# Altium PCB vt18_cpu_board.PcbDoc (part 4 of 7)
Units mil, origin at the board's own origin, x right, y up, seen from the top; angles counter-clockwise.
Board outline 2283.46 x 2244.09 mil, 8 copper layers (Top Layer, GND1, Signal Layer 1, POWER1, POWER2, Signal Layer 2, GND2, Bottom Layer), stack 66.304 mil thick; 339 components, 286 nets, 1965 pads, 1047 vias.
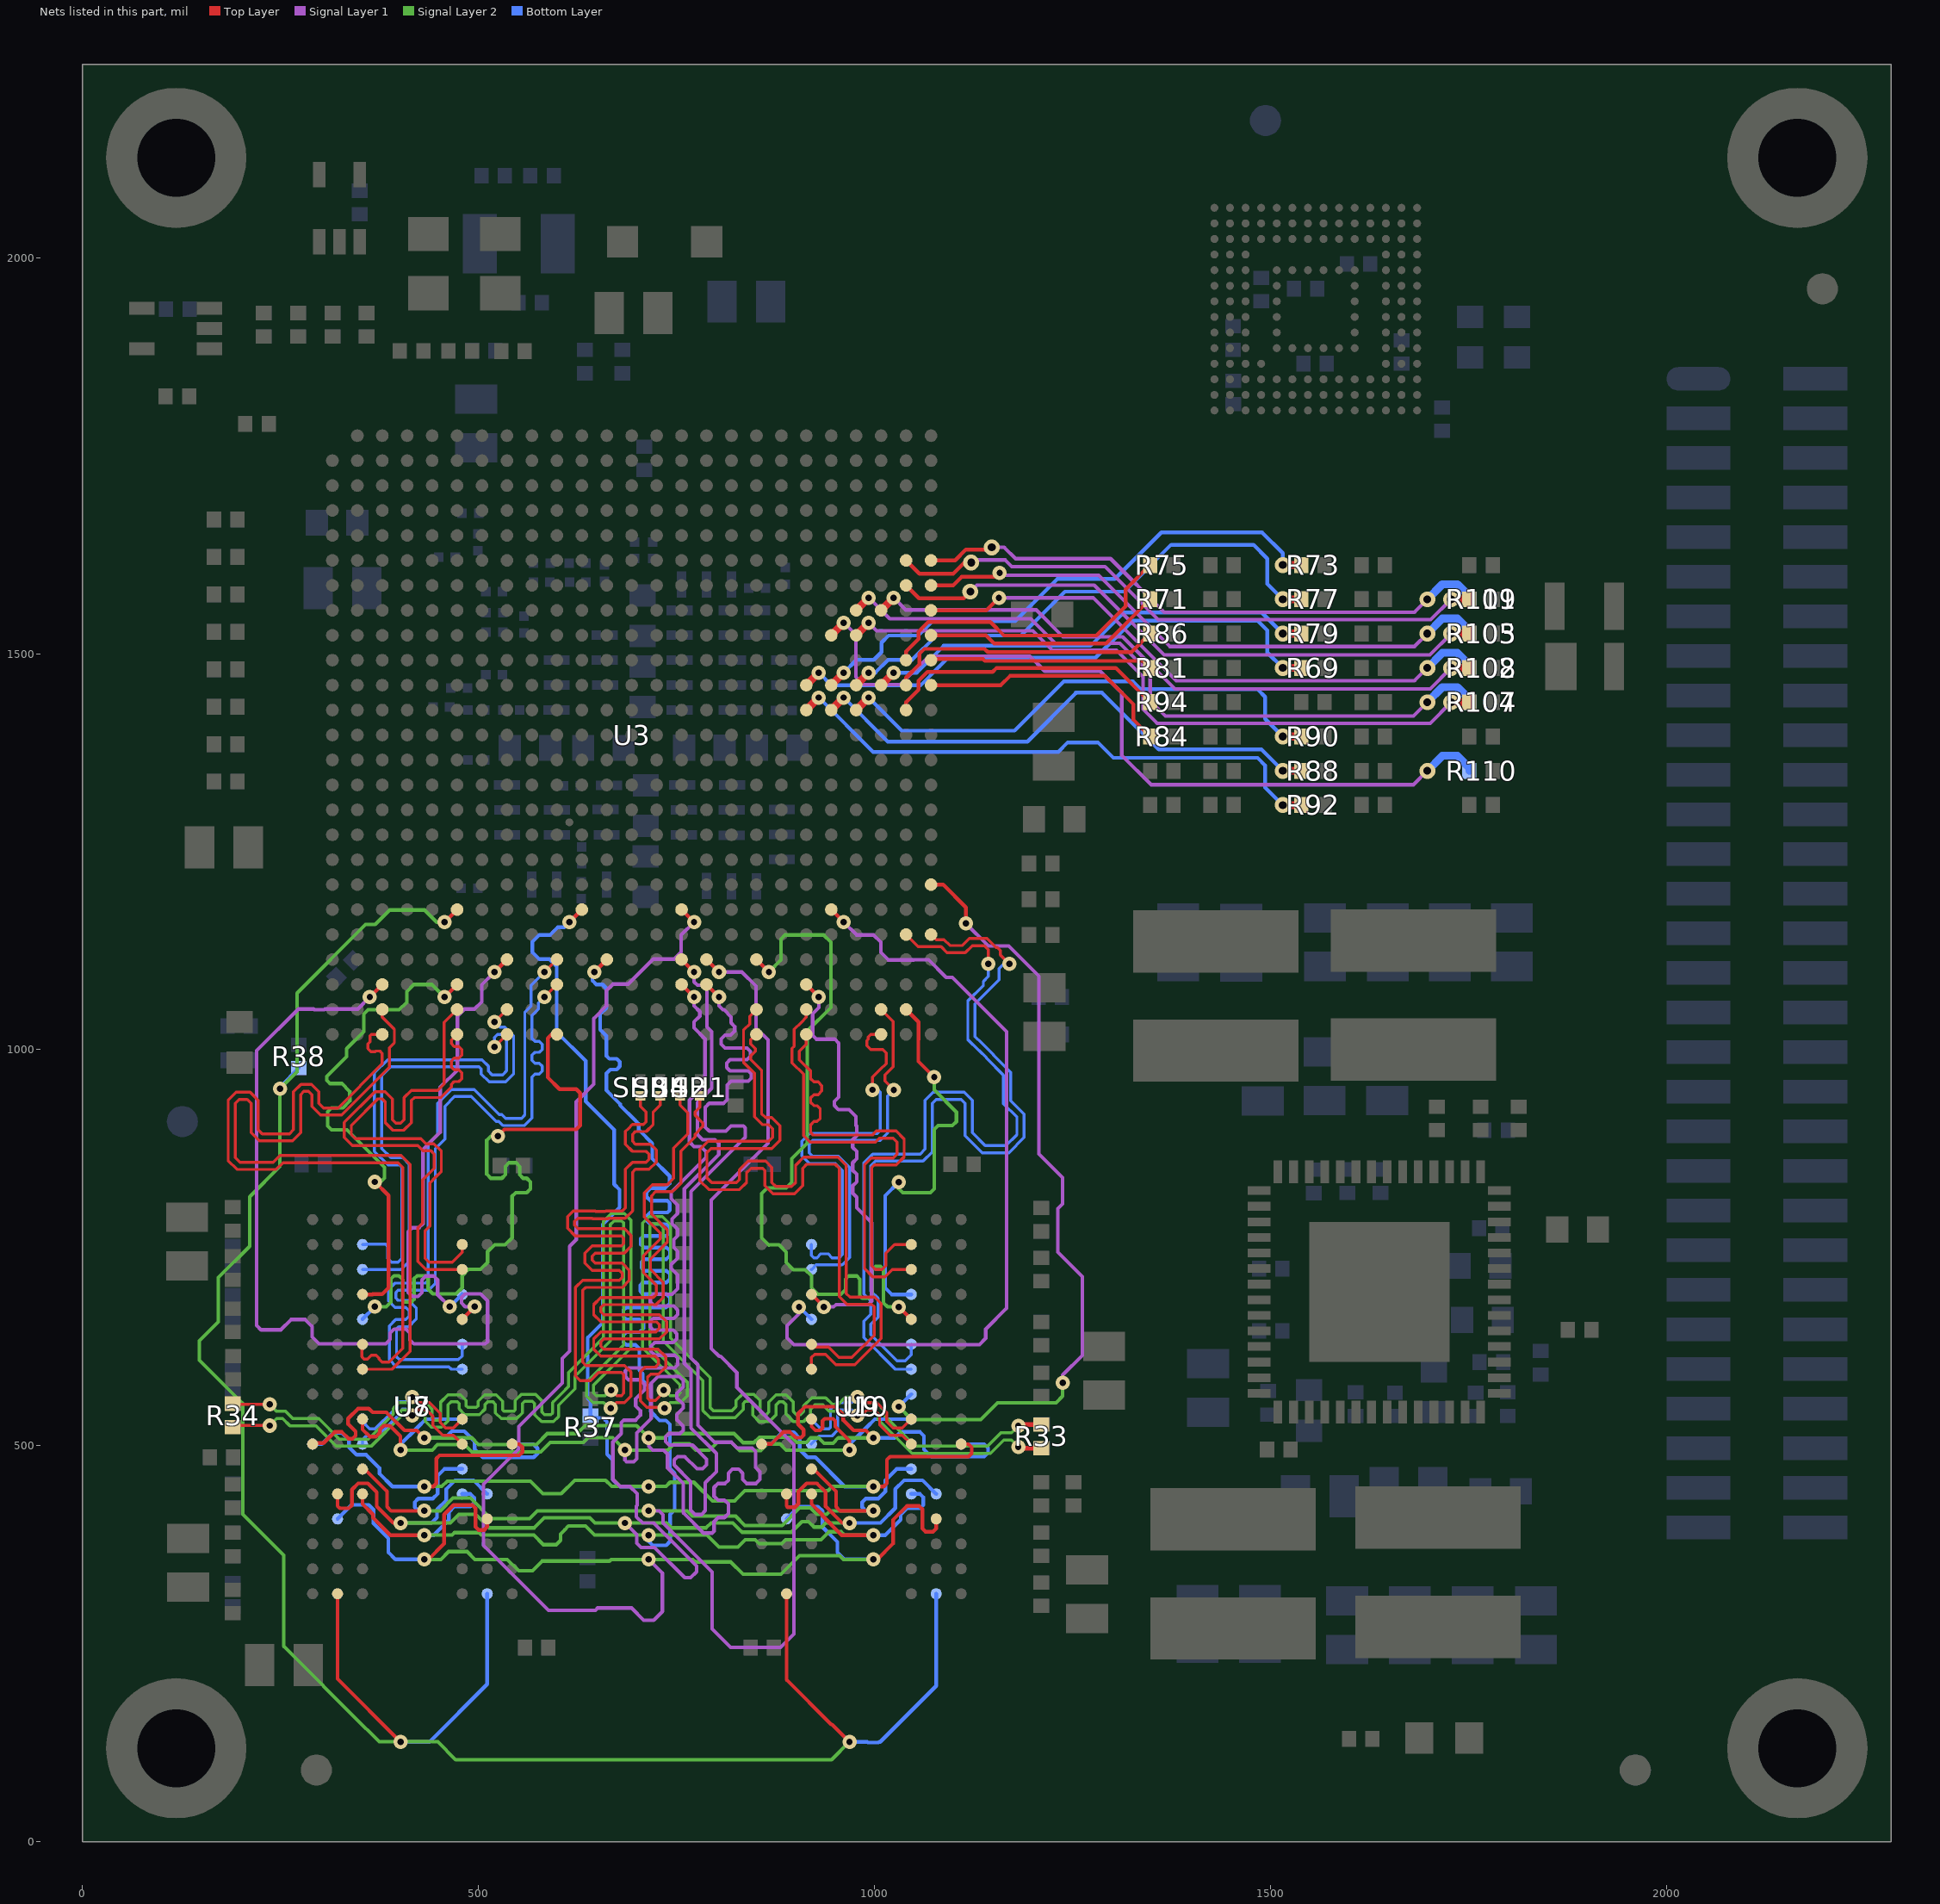
[diagram p10: the nets of this part, all layers, seen from the top]

## Via types
v1: diameter 18, hole 8, Top Layer to Bottom Layer, tented both sides, 718 vias
v2: diameter 20, hole 10, Top Layer to Bottom Layer, tented both sides, 300 vias
v3: diameter 25, hole 15, Top Layer to Bottom Layer, tented both sides, 27 vias
v4: diameter 17.99, hole 7.99, Top Layer to Bottom Layer, tented both sides, 2 vias

## Nets (pads, with @x,y where several pads share a name; then routed paths per layer and width w, separated by ;. In a path a pad name is that pad's centre, name@x,y a point inside that pad or via, vN(x,y) a via of type N, cw(c..) or ccw(c..) an arc to the next point about the centre after c; other vN are vias at no path point) (continued)
DRAM_D63: U3.W25 U9.H3 | length 1012.2
  Top Layer w4.7: U3.W25@1071.33,1208.36 1086.69,1208.36 1115.38,1179.67 v1(1115.38,1159.34)
  Signal Layer 1 w4.5: v1(1115.38,1159.34) 1143.89,1130.83 1169.33,1130.83 1207.38,1092.78 1207.38,868.34 1237.33,838.39 1237.33,805.39 1231.33,799.39 1231.33,744.39 1262.37,713.35 1262.37,614.05 1237.6,589.28 v1(1237.6,579.34)
  Signal Layer 2 w4.5: v1(1030.62,549.34) 1046.87,533.09 1134.13,533.09 1155.38,554.34 1229.34,554.34 1237.6,562.6 v1(1237.6,579.34)
  Bottom Layer w4.7: v1(1030.62,549.34) U9.H3@1046.37,565.1
DRAM_DQM0: U3.AC3 U8.E7 | length 1025.1
  Top Layer w4.7: v1(362.67,1066.63) U3.AC3@378.42,1082.38 ; U8.E7@479.43,659.59 479.44,659.89 v1(495.13,675.58)
  Signal Layer 1 w4.5: v1(362.67,1066.63) 347.42,1051.38 306,1051.38 305.21,1050.59 292.57,1050.59 291.78,1051.38 272.42,1051.38 219.89,998.85 219.89,651.83 225.38,646.34 250.38,646.34 263.38,659.34 281.19,659.34 289.89,650.64 289.89,637.34 298.4,628.83 382.87,628.83 388.38,634.34 388.38,642.34 393.38,647.34 408.38,647.34 413.38,642.34 413.38,633.59 418.38,628.59 508.38,628.59 511.37,631.58 511.37,681.9 ; v1(495.13,675.58) 483.14,675.58 478.38,680.34 478.38,687.34 482.86,691.82 502.71,691.82 511.4,683.14 511.4,681.93
DRAM_DQM1: U3.AC6 U8.D3 | length 653.9
  Top Layer w4.7: U8.D3@353.45,691.08 366.13,691.07 366.38,691.32 378.1,691.32 386.27,699.49 386.27,815.91 v1(369.13,833.06) ; v1(457.16,1066.63) U3.AC6@472.91,1082.38
  Signal Layer 2 w4.5: v1(369.13,833.06) 376.38,833.06 381.38,838.06 381.38,851.44 333.98,898.84 314.38,898.84 309.38,903.84 309.38,921.74 314.38,926.74 328.78,926.74 337.38,935.34 337.38,947.34 327.38,957.34 312.38,957.34 308.38,961.34 308.38,966.34 333.38,991.34 333.38,1001.34 354.92,1022.88 354.92,1044.88 360.38,1050.34 399.83,1050.34 409.44,1059.95 409.44,1073.4 418.38,1082.34 440.78,1082.34 456.49,1066.63 v1(457.16,1066.63)
DRAM_DQM2: U3.AB8 U7.D3 | length 608.4
  Top Layer w4.7: v1(520.15,1098.13) U3.AB8@535.9,1113.88
  Signal Layer 1 w4.5: v1(463.63,675.58) 448.37,690.84 448.37,709.34 443.37,714.34 433.38,714.34 428.38,709.34 428.38,693.34 423.38,688.34 416.38,688.34 411.38,693.34 411.38,770.24 416.38,775.24 424.89,775.24 429.89,780.24 429.89,873.85 451.53,895.49 451.53,952.49 473.41,974.37 473.41,1042.45 482.34,1051.38 494.98,1051.38 503.91,1060.31 503.91,1081.88 v1(520.15,1098.13)
  Bottom Layer w4.7: v1(463.63,675.58) 479.29,691.23 479.38,691.32 479.44,691.26 U7.D3@479.44,691.08
DRAM_DQM3: U3.AE10 U7.E7 | length 848.2
  Top Layer w4.7: v1(524.38,890.84) 527.73,894.19 527.73,894.34 532.73,899.34 623.38,899.34 628.38,904.34 628.38,945.34 623.38,950.34 602.19,950.34 587.38,965.15 587.38,1014.39 592.38,1019.39 U3.AE10@598.89,1019.39
  Signal Layer 2 w4.5: v1(369.13,675.58) 383.37,675.58 389.36,681.57 389.36,710.57 393.39,714.59 399.39,714.59 403.86,710.12 403.86,683.84 406.11,681.59 415.39,681.59 418.36,684.57 418.36,710.57 422.39,714.59 432.39,714.59 436.39,710.59 436.39,697.59 442.39,691.59 471.39,691.59 479.39,699.59 479.39,714.59 487.39,722.59 502.39,722.59 511.39,731.59 511.39,732.24 ; 511.37,732.25 511.37,744.89 520.31,753.82 532.94,753.82 533.11,753.65 533.45,753.65 542.39,762.59 542.39,815.17 546.89,819.67 560.88,819.67 565.38,824.17 565.38,833.17 560.88,837.67 556.35,837.67 551.85,842.17 551.85,852.84 547.35,857.34 538.35,857.34 533.85,852.84 533.85,842.17 529.35,837.67 515.38,837.67 510.38,842.67 510.38,885.84 515.38,890.84 v1(524.38,890.84)
  Bottom Layer w4.7: U7.E7@353.46,659.59 353.46,659.75 353.38,659.83 v1(369.13,675.58)
DRAM_DQM4: U3.AB18 U10.E7 | length 927
  Top Layer w4.7: U3.AB18@850.86,1113.88 v1(866.61,1098.13) ; v1(1030.62,675.32) U10.E7@1046.36,659.59
  Signal Layer 2 w4.5: v1(866.61,1098.13) 881.86,1113.38 881.86,1139.87 886.86,1144.87 935.92,1144.87 944.85,1135.94 944.85,1053.34 915.1,1023.59 915.1,882.06 895.38,862.34 895.38,832.34 888.38,825.34 864.38,825.34 857.38,818.34 857.38,762.34 866.49,753.23 866.83,753.57 879.46,753.57 888.39,744.63 888.39,732 ; 888.38,731.98 888.38,731.34 897.38,722.34 912.38,722.34 920.38,714.34 920.38,699.34 928.38,691.34 957.38,691.34 963.38,697.34 963.38,710.34 967.38,714.34 977.38,714.34 981.4,710.32 981.4,689.32 984.38,686.34 993.66,686.34 996.9,689.59 996.9,721.86 1001.38,726.34 1007.38,726.34 1011.4,722.32 1011.4,680.32 1016.4,675.32 v1(1030.62,675.32)
DRAM_DQM5: U3.AC20 U10.D3 | length 564.6
  Top Layer w4.7: U3.AC20@913.85,1082.38 v1(929.6,1066.63) ; U10.D3@920.38,691.08 v1(936.14,675.32)
  Signal Layer 1 w4.5: v1(929.6,1066.63) 929.6,1053.34 921.88,1045.62 921.88,1017.84 926.38,1013.34 949.88,1013.34 954.88,1008.34 954.88,940.32 949.38,934.82 949.38,929.59 954.38,924.59 967.7,924.59 976.63,915.66 976.63,904.34 977.38,903.59 977.38,891.3 972.38,886.3 972.38,876.8 977.38,871.8 977.38,862.3 972.38,857.3 972.38,847.8 977.38,842.8 977.38,833.3 972.38,828.3 972.38,818.8 977.38,813.8 977.38,800.32 996.38,781.32 996.38,682.32 992.4,678.34 951.4,678.34 948.38,675.32 v1(936.14,675.32)
DRAM_DQM6: U3.AD24 U9.D3 | length 509.5
  Top Layer w4.7: U3.AD24@1039.84,1050.88 1055.58,1035.14 1055.58,1012.86 1055.38,1012.66 1055.38,985.34 v1(1075.38,965.34)
  Signal Layer 2 w4.5: v1(1030.62,832.8) 1030.62,824.34 1035.62,819.34 1070.38,819.34 1075.38,824.34 1075.38,899.34 1080.38,904.34 1098.38,904.34 1103.38,909.34 1103.38,921.34 1075.38,949.34 v1(1075.38,965.34)
  Bottom Layer w4.7: v1(1030.62,832.8) 1013.48,815.66 1013.48,699.24 1021.65,691.07 U9.D3@1046.37,691.08
DRAM_DQM7: U3.Y21 U9.E7 | length 1016.8
  Top Layer w4.7: U3.Y21@945.35,1176.87 v1(961.1,1161.12)
  Signal Layer 1 w4.5: v1(904.64,675.32) 904.64,666.6 889.39,651.35 889.39,636.28 898.09,627.58 1132.38,627.58 1140.36,635.56 1140.36,647.06 1166.88,673.58 1166.88,1022.75 1098.24,1091.39 1090.33,1091.39 1068.27,1113.45 1049.27,1113.45 1049.2,1113.38 1017.34,1113.38 1007.84,1122.88 1007.84,1135.94 998.91,1144.87 977.34,1144.87 v1(961.1,1161.12)
  Bottom Layer w4.7: v1(904.64,675.32) U9.E7@920.39,659.59
DRAM_RAS_B: U3.AB15 U7.J3 U8.J3 U9.J3 U10.J3 | length 2284.2
  Top Layer w4.7: U8.J3@353.45,533.6 353.46,520.45 358.46,515.45 358.99,515.45 363.05,511.39 370.33,511.39 375.33,516.39 375.33,520.34 380.33,525.34 388.07,525.34 401.38,512.03 401.38,494.66 v1(401.45,494.59) ; U3.AB15@756.37,1113.88 v1(772.12,1098.13) ; U10.J3@920.38,533.6 920.39,524.34 925.39,519.34 931.38,519.34 934.38,522.34 934.38,531.34 937.06,534.02 947.63,534.02 950.34,531.3 950.34,524.3 968.31,506.34 v1(968.38,494.59) v1(968.38,494.59)
  Signal Layer 1 w4.5: v1(684.88,494.59) 684.88,481.84 686.88,479.84 695.88,479.84 699.63,483.59 699.63,516.26 718.04,534.67 718.04,579 726.38,587.34 753.38,587.34 758.38,582.34 758.38,574.34 750.38,566.34 750.38,560.34 758.38,552.34 758.38,547.54 750.13,539.3 750.13,532.8 758.38,524.55 758.38,519.55 754.13,515.3 740.59,515.3 736.38,511.08 736.38,505.13 740.59,500.91 770.13,500.91 788.01,483.04 788.01,475.97 782.92,470.88 775.84,470.88 760.31,486.41 751.38,486.41 747.13,482.17 747.13,475.62 767.88,454.87 767.88,418.79 773.57,413.09 781.45,413.09 786.38,418.02 786.38,453.34 800.38,467.34 800.38,490.34 768.37,522.35 768.37,595.35 759.87,603.85 759.87,824.43 803.38,867.94 803.38,881.34 798.38,886.34 782.81,886.34 776.38,892.77 776.38,933.31 794.38,951.31 794.38,1022.8 788.37,1028.82 788.37,1069.35 ; v1(772.12,1098.13) 772.12,1085.6 776.38,1081.34 783.38,1081.34 788.38,1076.34 788.38,1069.37
  Signal Layer 2 w4.5: v1(401.45,494.59) 441.38,494.59 448.23,501.44 482.28,501.44 491.38,492.34 578.38,492.34 590.38,504.34 632.38,504.34 638.38,510.34 669.13,510.34 v1(684.88,494.59) 684.93,494.54 738.98,494.54 746.78,502.34 766.38,502.34 774.38,494.34 791.38,494.34 801.38,504.34 819.41,504.34 829.86,493.89 856.38,493.89 864.83,502.34 880.55,502.34 888.3,494.59 v1(968.38,494.59)
  Bottom Layer w4.7: v1(401.45,494.59) 401.45,501.65 422.74,522.94 ; 422.74,522.99 433.34,533.59 U7.J3@479.44,533.6 ; v1(968.38,494.59) 968.38,501.65 989.72,522.99 ; 989.74,522.99 1000.34,533.59 U9.J3@1046.37,533.6
DRAM_RESET_B: R38.1 U3.Y6 U7.T2 U8.T2 U9.T2 U10.T2 | length 2947.3
  Top Layer w4.7: U8.T2@321.95,313.13 321.96,205.68 v1(401.45,126.19) ; v1(457.16,1161.12) U3.Y6@472.91,1176.87 ; U10.T2@888.88,313.13 888.89,204.52 945.22,148.19 946.38,148.19 v1(968.38,126.19)
  Signal Layer 2 w4.5: v1(457.16,1161.12) 447.23,1161.12 431.98,1176.37 387.85,1176.37 369.48,1158 357.44,1158 270.89,1071.44 270.89,972.42 v1(249.27,950.8) 249.27,852.73 210.88,814.34 210.88,751.84 171.38,712.34 171.38,656.38 147.63,632.64 147.63,608.09 202.38,553.34 202.38,413.34 253.89,361.83 253.89,246.83 354.08,146.64 354.15,146.64 363.08,137.71 363.08,137.64 374.53,126.19 v1(401.45,126.19) 448.53,126.19 471.12,103.6 945.78,103.6 v1(968.38,126.19)
  Bottom Layer w4.5: v1@249.95,951.49 249.95,953.92 R38.1@272.99,976.95
  Bottom Layer w4.7: v1(401.45,126.19) 438.3,126.19 510.94,198.83 U7.T2@510.94,313.13 ; v1(968.38,126.19) 990.6,126.19 991.6,125.19 1005.16,125.19 1006.16,126.19 1007.23,126.19 1077.87,196.83 U9.T2@1077.87,313.13
  Bottom Layer w10: v1(249.27,950.8) v1@249.95,951.49
DRAM_SDBA0: U3.AC15 U7.M2 U8.M2 U9.M2 U10.M2 | length 2502.4
  Top Layer w4.7: U8.M2@321.95,439.11 321.96,423.84 324.85,420.96 336.11,420.96 340.11,424.96 340.1,444.64 348.01,452.54 360.18,452.54 371.38,441.34 371.38,423.41 392.3,402.49 v1(401.45,402.49) ; U3.AC15@756.37,1082.38 v1(772.12,1066.63) ; U10.M2@888.88,439.11 888.89,423.83 890.38,422.34 899.56,422.34 903.98,426.76 903.98,442.34 914.18,452.54 927.11,452.54 938.31,441.34 938.31,423.41 959.23,402.49 v1(968.38,402.49)
  Signal Layer 1 w4.5: v1(684.88,402.49) 699.63,387.74 699.63,377.09 705.03,371.69 722.03,371.69 760.38,333.34 767.88,333.34 775.37,340.83 775.37,348.22 721.19,402.39 707.33,402.39 699.38,410.34 699.38,423.91 700.13,424.66 700.13,439.51 691.2,448.44 679.38,448.44 679.18,448.64 678.56,448.64 669.63,457.57 669.63,504.59 680.38,515.34 680.38,529.28 683.34,532.24 698.34,532.24 704.34,538.24 704.34,544.24 698.34,550.24 698.34,559.24 709.54,570.45 709.54,577.24 703.54,583.24 689.34,583.24 685.34,587.24 685.34,594.34 689.34,598.34 747.69,598.34 751.37,602.02 751.37,610.66 747.69,614.34 722.38,614.34 717.38,619.34 717.38,625.34 722.38,630.34 745.77,630.34 750.38,634.95 750.38,641.47 745.77,646.09 720.63,646.09 716.88,649.83 716.88,656.84 720.63,660.59 746.37,660.59 751.37,665.59 751.37,671.34 746.37,676.34 721.88,676.34 716.88,681.34 716.88,687.15 721.07,691.34 744.38,691.34 751.37,698.33 751.37,715.78 743.38,723.77 743.38,728.98 751.37,736.97 751.37,745.35 746.38,750.34 746.38,760.34 751.37,765.33 751.37,773.35 748.38,776.34 748.38,776.48 744.38,780.48 744.38,786.19 751.37,793.19 751.37,803.86 743.38,811.86 743.38,819.97 787.38,863.97 787.38,871.34 780.88,877.84 771.88,877.84 766.38,883.34 766.38,936.34 785.88,955.84 785.88,1013.84 772.12,1027.6 772.12,1035.08 779.38,1042.34 779.38,1048.08 772.12,1055.34 v1(772.12,1066.63)
  Signal Layer 2 w4.5: v1(401.45,402.49) 464.23,402.49 475.08,413.34 496.38,413.34 513.38,396.34 570.38,396.34 583.05,409.01 640.45,409.01 646.97,402.49 v1(684.88,402.49) 684.98,402.59 737.38,402.59 743.63,396.34 787.38,396.34 793.63,402.59 820.7,402.59 820.8,402.49 821.18,402.49 832.33,391.34 832.85,390.84 894.73,390.84 908.23,404.34 916.53,404.34 923.53,397.34 933.38,397.34 938.53,402.49 v1(968.38,402.49)
  Bottom Layer w4.7: v1(401.45,402.49) 440.6,402.49 447.45,409.34 447.45,419.54 459.38,431.47 459.38,445.34 470.38,456.34 493.7,456.34 U7.M2@510.94,439.11 ; v1(968.38,402.49) 1007.53,402.49 1026.31,421.27 1026.31,445.34 1037.31,456.34 1060.63,456.34 U9.M2@1077.87,439.11
DRAM_SDBA1: U3.Y15 U7.N8 U8.N8 U9.N8 U10.N8 | length 2560.3
  Top Layer w4.7: v1(431.45,356.44) 436.55,356.44 456.45,376.34 456.45,413.04 468.41,424.99 492.13,424.99 496.13,420.99 496.13,397.64 500.13,393.64 506.94,393.64 510.94,397.64 U8.N8@510.93,407.62 ; U3.Y15@756.37,1176.87 v1(772.12,1161.12) ; v1(998.38,356.44) 1003.48,356.44 1023.38,376.34 1023.38,406.41 1040.81,423.84 1056.38,423.84 1060.38,419.84 1060.38,395.44 1064.38,391.44 1073.87,391.44 1077.87,395.44 U10.N8@1077.86,407.62
  Signal Layer 1 w4.5: v1(714.88,356.44) 732.18,339.14 732.18,290.78 721.2,279.79 708.56,279.79 693.21,295.14 650.18,295.14 647.38,292.34 588.38,292.34 506.38,374.34 506.38,451.34 550.88,495.84 550.88,524.27 605.63,579.02 605.63,610.09 614.88,619.34 614.88,751.84 623.38,760.34 623.38,934.34 645.38,956.34 645.38,1039.34 661.39,1055.35 661.39,1074.34 669.92,1082.88 688.92,1082.88 720.41,1114.37 746.94,1114.37 755.87,1123.3 755.87,1144.87 v1(772.12,1161.12)
  Signal Layer 2 w4.5: v1(431.45,356.44) 452.48,356.44 462.38,366.34 485.43,366.34 495.33,356.44 536.28,356.44 550.62,342.1 568.11,342.1 580.35,354.34 665.28,354.34 667.38,356.44 v1(714.88,356.44) 770.38,356.44 773.48,353.34 818.36,353.34 833.86,337.84 881.79,337.84 905.33,361.39 955.79,361.39 960.73,356.44 v1(998.38,356.44)
  Bottom Layer w4.7: U7.N8@321.96,407.62 339.7,425.34 361.45,425.34 367.38,419.41 367.38,401.96 386.1,383.24 386.1,365.43 395.09,356.44 v1(431.45,356.44) ; U9.N8@888.89,407.62 904.5,423.22 928.5,423.22 934.31,417.41 934.31,397.41 953.03,378.69 953.03,365.43 962.02,356.44 v1(998.38,356.44)
DRAM_SDBA2: U3.AB12 U7.M3 U8.M3 U9.M3 U10.M3 | length 2328.9
  Top Layer w4.7: U8.M3@353.45,439.11 353.46,426.49 366.81,413.14 366.81,408.91 388.58,387.14 v1(431.45,387.14) ; v1(646.14,1098.13) U3.AB12@661.88,1113.88 ; U10.M3@920.38,439.11 920.39,426.49 933.74,413.14 933.74,411.98 958.58,387.14 v1(998.38,387.14)
  Signal Layer 2 w4.5: v1(431.45,387.14) 466.38,387.14 469.58,390.34 500.33,390.34 503.53,387.14 569.81,387.14 581.86,375.09 598.13,375.09 603.52,380.48 603.52,388.58 608.43,393.49 613.54,398.59 635.13,398.59 646.58,387.14 v1(714.88,387.14) 788.58,387.14 803.63,372.09 827.38,372.09 836.63,381.34 849.38,381.34 854.38,376.34 882.83,376.34 887.83,381.34 932.38,381.34 942.38,391.34 957.96,391.34 962.06,387.24 962.48,387.24 962.58,387.14 v1(998.38,387.14)
  Bottom Layer w4.7: v1(431.45,387.14) 443.13,387.14 462.36,406.37 462.36,416.32 469.38,423.34 489.76,423.34 494.38,427.96 494.38,434.49 489.76,439.1 U7.M3@479.44,439.11 ; v1(646.14,1098.13) 643.69,1095.68 643.69,1087.34 648.69,1082.34 656.49,1082.34 661.49,1077.34 661.49,1053.02 653.58,1045.11 653.58,1025.17 661.49,1017.26 661.49,992.23 665.08,988.64 674.4,988.64 678.38,984.66 678.38,979.02 674.4,975.04 666.38,975.04 661.38,970.04 661.38,948.86 666.69,943.56 678.68,931.57 678.68,929.97 697.23,911.42 700.38,908.26 702.38,906.25 702.38,898.72 719.38,881.72 719.38,862.34 741.38,840.34 741.38,831.34 735.38,825.34 717.38,825.34 712.07,820.03 712.07,814.34 717.07,809.34 738.38,809.34 741.38,806.34 741.38,797.34 738.46,794.42 716.69,794.42 712.38,790.12 712.38,784.03 716.69,779.72 737.27,779.72 741.57,775.42 741.57,769.33 737.27,765.02 708.69,765.02 705.08,761.42 705.08,753.93 708.69,750.32 737.27,750.32 741.57,746.02 741.57,739.93 737.27,735.62 709.69,735.62 706.08,732.02 706.08,724.53 709.69,720.92 737.27,720.92 741.57,716.62 741.57,710.53 737.27,706.22 707.69,706.22 704.08,702.62 704.08,695.13 707.69,691.52 737.27,691.52 741.57,687.22 741.57,679.63 736.57,674.63 686.38,674.63 682.88,671.13 682.88,662.84 686.38,659.34 703.38,659.34 708.38,654.34 708.38,648.34 703.38,643.34 686.38,643.34 682.88,639.84 682.88,630.84 686.38,627.34 698.08,627.34 703.08,622.34 703.08,595.34 707.38,591.04 707.38,582.49 717.38,572.49 717.38,543.13 728.52,531.99 736.57,531.99 741.57,526.99 741.57,471.45 747.08,465.95 747.63,465.4 747.63,419.13 741.98,413.48 741.98,379.34 736.98,374.34 719.88,374.34 714.88,379.34 v1(714.88,387.14) ; v1(998.38,387.14) 1013.49,387.14 1033.02,406.67 1033.02,413.14 1040.84,420.96 1057.38,420.97 1061.38,424.96 1061.38,435.1 1057.38,439.1 U9.M3@1046.37,439.11
DRAM_SDCKE0: R37.1 U3.Y11 U7.K9 U8.K9 U9.K9 U10.K9 | length 2234.7
  Top Layer w4.7: v1(431.45,448.54) 442.8,448.54 446.8,452.54 446.8,483.89 450.8,487.89 551.33,487.89 555.33,491.89 555.33,498.1 551.33,502.1 U8.K9@542.42,502.11 ; v1(614.64,1161.12) U3.Y11@630.39,1176.87 ; v1(998.38,448.54) 1011.58,448.54 1015.58,452.54 1015.58,482.34 1019.58,486.34 1118.68,486.34 1122.68,490.34 1122.68,498.1 1118.68,502.1 U10.K9@1109.35,502.11
  Signal Layer 2 w4.5: v1(431.45,448.54) 453.58,448.54 460.43,455.39 565.33,455.39 581.38,439.34 604.38,439.34 621.43,456.39 660.33,456.39 668.18,448.54 v1(714.88,448.54) 736.58,448.54 741.93,453.89 771.83,453.89 795.38,430.34 823.38,430.34 836.38,443.34 941.38,443.34 946.58,448.54 v1(998.38,448.54)
  Bottom Layer w4.7: U7.K9@290.47,502.11 302.14,502.1 316.38,516.34 327.38,516.34 336.38,507.34 336.38,498.34 345.97,488.75 357.97,488.75 374.78,471.94 374.78,464.94 391.18,448.54 v1(431.45,448.54) ; v1(614.64,1161.12) 607.99,1154.47 599.88,1154.47 590.38,1144.97 576.78,1144.97 567.79,1135.98 567.79,1123.26 576.78,1114.27 589.5,1114.27 598.68,1105.1 598.68,1022.35 635.28,985.75 635.28,934.66 671.13,898.81 671.13,830.14 677.93,823.34 677.93,800.67 656.78,779.52 656.78,655.38 637.83,636.44 637.83,559.75 641.34,556.24 R37.1@641.34,538.24 644.47,535.11 657.45,535.11 660.52,531.99 662.34,530.17 662.34,489.24 669.53,482.05 669.53,457.19 678.18,448.54 v1(714.88,448.54) ; U9.K9@857.4,502.11 869.04,502.1 883.89,516.94 897.83,516.94 905.41,509.36 905.41,495.31 915.38,485.34 925.22,485.34 962.02,448.54 v1(998.38,448.54)
DRAM_SDCLK0: R33.1 SH1.2 U9.J7 U10.J7 | length 2082.1
  Top Layer w3.7: v1(733.88,570.34) 733.88,567.84 723.38,557.34 716.38,557.34 713.38,560.34 713.38,586.34 717.38,590.34 727.38,590.34 736.38,599.34 736.38,612.34 726.68,622.04 658.08,622.04 654.38,625.74 654.38,631.04 658.08,634.74 728.41,634.74 737.38,643.71 737.38,656.47 728.41,665.44 658.08,665.44 654.38,669.14 654.38,674.44 658.08,678.14 683.38,678.14 724.17,678.13 733.38,687.34 733.38,706.34 717.2,722.52 717.2,736.16 738.38,757.34 738.38,772.34 718.38,792.34 718.38,815.65 723.38,820.65 744.66,820.65 749.38,825.37 755.38,831.38 755.38,871.86 773.38,889.86 773.38,893.34 783.38,903.34 783.38,907.34 773.38,917.34 773.38,921.43 779.38,927.43 SH1.2@779.38,941.83 ; v1(978.38,561.34) 983.38,561.34 990.38,554.34 1003.04,554.34 1015.38,542 1015.38,530.34 1023.38,522.34 1035.12,522.34 U10.J7@1046.36,533.6
  Top Layer w6: v1(1181.49,525.27) 1182.81,526.6 R33.1@1210.38,526.6
  Signal Layer 2 w3.8: v1(733.88,570.34) 734.88,570.34 741.88,563.34 751.38,563.34 754.38,566.34 754.38,576.61 707.31,623.68 707.31,781.27 715.38,789.34 732.11,789.34 742.38,779.07 742.38,636.07 792.38,586.07 792.38,548.16 796.18,544.36 820.11,544.36 825.11,549.36 825.11,557.07 833.07,565.03 847.42,565.03 855.38,557.07 855.38,542.34 858.38,539.34 863.38,539.34 866.38,542.34 866.38,555.07 875.65,564.34 888.38,564.34 897.38,555.34 897.38,543.34 901.38,539.34 906.38,539.34 910.38,543.34 910.38,550.34 920.65,560.61 938.38,560.61 946.65,552.34 954.38,552.34 963.38,561.34 v1(978.38,561.34) 983.38,561.34 990.38,554.34 1002.11,554.34 1013.38,543.07 1013.38,537.07 1051.11,499.34 1142.65,499.34 1159.65,516.34 1172.79,516.34 1181.49,525.04 v1(1181.49,525.27)
  Bottom Layer w3.7: U9.J7@920.39,533.6 920.39,533.33 932.38,521.34 942.38,521.34 944.38,523.34 944.38,546.34 952.38,554.34 971.38,554.34 v1(978.38,561.34)
DRAM_SDCLK0_B: R33.2 SH2.2 U9.K7 U10.K7 | length 2081.2
  Top Layer w3.7: v1(734.88,547.34) 733.88,548.34 712.65,548.34 704.38,556.61 704.38,593.34 710.38,599.34 723.38,599.34 727.38,603.34 727.38,608.61 722.95,613.04 654.35,613.04 645.38,622.01 645.38,634.77 654.35,643.74 723.78,643.74 728.38,648.34 728.38,652.74 724.68,656.44 654.35,656.44 645.38,665.41 645.38,678.17 654.35,687.14 705.81,687.14 720.44,687.13 724.38,691.07 724.38,702.61 708.2,718.79 708.2,739.89 729.38,761.07 729.38,768.61 709.38,788.61 709.38,819.38 719.65,829.65 738.38,829.65 746.38,837.65 746.38,875.59 764.38,893.59 764.38,920.34 754.38,930.34 SH2.2@754.38,941.83 ; v1(978.38,538.34) 983.38,538.34 990.38,545.34 999.31,545.34 1006.38,538.27 1006.38,526.61 1019.65,513.34 1035.13,513.34 U10.K7@1046.36,502.11
  Top Layer w6: v1(1181.49,498.41) 1182.82,497.08 R33.2@1210.38,497.08
  Signal Layer 2 w3.8: v1(734.88,547.34) 741.88,554.34 755.11,554.34 763.38,562.61 763.38,580.34 716.31,627.41 716.31,777.54 719.11,780.34 728.38,780.34 733.38,775.34 733.38,632.34 783.38,582.34 783.38,544.43 792.45,535.36 823.84,535.36 834.11,545.63 834.11,553.34 836.8,556.03 843.69,556.03 846.38,553.34 846.38,538.61 854.65,530.34 867.11,530.34 875.38,538.61 875.38,551.34 879.38,555.34 884.65,555.34 888.38,551.61 888.38,539.61 897.65,530.34 910.11,530.34 919.38,539.61 919.38,546.61 924.38,551.61 934.65,551.61 942.92,543.34 958.11,543.34 963.11,538.34 v1(978.38,538.34) 983.38,538.34 990.38,545.34 998.38,545.34 1004.38,539.34 1004.38,533.34 1047.38,490.34 1146.38,490.34 1163.38,507.34 1172.79,507.34 1181.49,498.64 v1(1181.49,498.41)
  Bottom Layer w3.7: U9.K7@920.39,502.11 920.39,502.35 930.38,512.34 946.11,512.34 953.38,519.61 953.38,542.61 956.11,545.34 971.38,545.34 v1(978.38,538.34)
DRAM_SDCLK1: R34.1 SH3.2 U7.J7 U8.J7 | length 2113.4
  Top Layer w3.7: v1(416.38,561.34) 423.38,554.34 438.11,554.34 451.38,541.07 451.38,529.34 458.38,522.34 468.19,522.34 U8.J7@479.43,533.6 ; v1(667.55,570.34) 674.55,563.34 680.38,563.34 683.38,566.34 683.38,589.61 680.65,592.34 651.38,592.34 641.38,582.34 628.38,582.34 622.38,588.34 622.38,699.87 631.35,708.84 677.66,708.84 681.38,712.56 681.38,717.82 677.66,721.54 643.37,721.54 634.38,730.53 634.38,743.25 643.37,752.24 680.28,752.24 683.38,755.34 683.38,761.94 680.38,764.94 622.05,764.94 612.38,774.61 612.38,789.34 619.38,796.34 647.18,796.34 647.73,795.79 660.03,795.79 660.58,796.34 681.38,796.34 685.38,800.34 685.38,849 694.35,857.97 711.68,857.97 715.38,861.67 715.38,867.97 711.68,871.67 694.35,871.67 685.38,880.64 685.38,896.8 689.02,900.43 694.28,905.71 708.02,905.71 711.38,909.07 711.38,921.34 704.38,928.34 SH3.2@704.38,941.83
  Top Layer w3.8: R34.1@189.45,553.1 190.33,552.22 236.22,552.22 v1(236.27,552.27)
  Signal Layer 2 w3.8: v1(236.27,552.27) 245.2,543.34 256.38,543.34 265.38,534.34 298.11,534.34 324.11,508.34 360.65,508.34 392.38,540.07 392.38,547.07 399.65,554.34 409.38,554.34 v1(416.38,561.34) 423.38,554.34 433.11,554.34 441.51,545.93 441.51,534.93 444.11,532.34 449.65,532.34 452.38,535.07 452.38,555.34 461.38,564.34 477.11,564.34 484.38,557.07 484.38,550.34 486.38,548.34 497.38,548.34 499.38,550.34 499.38,556.07 507.65,564.34 522.11,564.34 530.38,556.07 530.38,545.34 532.38,543.34 544.38,543.34 546.38,545.34 546.38,557.07 554.34,565.03 571.69,565.03 579.65,557.07 579.65,543.07 583.36,539.36 591.45,539.36 593.29,541.19 593.29,554.43 594.34,555.48 596.78,557.93 604.77,565.92 ; 604.78,565.92 613.81,574.96 613.81,592.5 657.38,636.07 657.38,783.01 667.42,793.06 684.25,793.06 692.18,785.13 692.45,785.13 692.45,623.68 645.38,576.61 645.38,566.34 648.38,563.34 659.55,563.34 666.55,570.34 v1(667.55,570.34)
  Bottom Layer w3.7: U7.J7@353.46,533.6 353.46,530.26 362.38,521.34 369.1,521.34 392.1,544.34 392.1,546.79 394.88,549.57 394.88,549.84 400.38,555.34 410.38,555.34 v1(416.38,561.34)
DRAM_SDCLK1_B: R34.2 SH4.2 U7.K7 U8.K7 | length 2113.8
  Top Layer w3.7: v1(416.38,538.34) 423.38,545.34 434.38,545.34 442.38,537.34 442.38,525.61 454.65,513.34 468.2,513.34 U8.K7@479.43,502.11 ; v1(666.88,547.34) 673.88,554.34 684.11,554.34 692.38,562.61 692.38,593.34 684.38,601.34 635.38,601.34 631.38,605.34 631.38,696.14 635.08,699.84 681.39,699.84 690.38,708.83 690.38,721.55 681.39,730.54 647.1,730.54 643.38,734.26 643.38,739.52 647.1,743.24 684.01,743.24 692.38,751.61 692.38,765.67 684.11,773.94 625.78,773.94 621.38,778.34 621.38,783.34 625.38,787.34 643.45,787.34 644,786.79 663.76,786.79 664.31,787.34 685.11,787.34 694.38,796.61 694.38,845.27 698.08,848.97 715.41,848.97 724.38,857.94 724.38,873.34 717.05,880.67 698.08,880.67 694.38,884.37 694.38,893.07 698.02,896.71 711.74,896.71 720.38,905.34 720.38,921.06 729.38,930.06 SH4.2@729.38,941.83
  Top Layer w3.8: R34.2@189.45,523.58 191.28,525.41 v1(236.27,525.41)
  Signal Layer 2 w3.8: v1(236.27,525.41) 245.2,534.34 252.65,534.34 261.65,525.34 294.38,525.34 320.38,499.34 364.38,499.34 401.38,536.34 401.38,543.34 403.38,545.34 409.38,545.34 v1(416.38,538.34) 423.38,545.34 429.38,545.34 432.51,542.2 432.51,531.2 440.38,523.34 453.38,523.34 461.09,531.06 461.38,531.06 461.38,551.61 465.11,555.34 473.38,555.34 475.38,553.34 475.38,546.61 482.65,539.34 501.11,539.34 508.38,546.61 508.38,552.34 511.38,555.34 518.38,555.34 521.38,552.34 521.38,541.61 528.65,534.34 548.11,534.34 555.38,541.61 555.38,553.34 558.07,556.03 567.96,556.03 570.65,553.34 570.65,539.34 579.63,530.36 594.45,530.36 600.77,536.67 601.09,536.99 601.09,551.19 621.61,571.71 621.61,587.57 666.38,632.34 666.38,779.28 671.15,784.06 680.53,784.06 683.45,781.13 683.45,627.41 636.38,580.34 636.38,562.61 644.65,554.34 657.88,554.34 664.88,547.34 v1(666.88,547.34)
  Bottom Layer w3.7: U7.K7@353.46,502.11 353.46,507.42 358.38,512.34 372.83,512.34 401.1,540.61 401.1,543.06 403.88,545.84 403.88,546.11 404.11,546.34 408.38,546.34 v1(416.38,538.34)
DRAM_SDODT0: U3.AC16 U7.K1 U8.K1 U9.K1 U10.K1 | length 2714.2
  Top Layer w4.7: U8.K1@290.46,502.11 291.71,503.34 304.33,503.34 308.6,507.62 318.31,517.34 327.38,517.34 335.74,508.98 341.02,508.98 344.74,512.7 344.74,517.98 335.31,527.41 335.31,534.33 347.93,546.95 361.42,546.95 366.16,542.21 383.51,542.21 406.38,519.34 422.05,519.34 v1(431.45,509.94) ; U3.AC16@787.87,1082.38 v1(803.62,1066.63) ; U10.K1@857.39,502.11 857.73,502.44 870.01,502.44 884.91,517.34 893.38,517.34 900.56,510.16 907.2,510.16 910.53,513.49 910.53,520.13 903.38,527.28 903.38,540.34 912.38,549.34 950.38,549.34 960.38,539.34 960.38,532.34 973.38,519.34 988.98,519.34 v1(998.38,509.94)
  Signal Layer 1 w4.5: v1(714.88,509.94) 714.88,499.34 719.73,494.49 721.19,494.49 721.34,494.34 733.63,494.34 738.63,489.34 738.63,472.09 758.38,452.34 758.38,415.35 784,389.73 794.95,389.73 797.38,392.16 797.38,404.34 802.38,409.34 810.38,409.34 815.38,414.34 815.38,426.34 810.38,431.34 802.38,431.34 797.38,436.34 797.38,447.34 802.38,452.34 811.38,452.34 815.38,456.34 815.38,465.34 820.38,470.34 828.38,470.34 833.38,465.34 833.38,457.34 838.38,452.34 850.38,452.34 855.38,457.34 855.38,467.34 849.88,472.84 849.88,492.59 845.38,497.09 826.66,497.09 819.34,504.41 798.34,504.41 776.87,525.88 776.87,602.34 768.37,610.84 768.37,820.9 836.88,889.41 836.88,901.34 834.38,903.84 818.88,903.84 812.13,897.09 791.38,897.09 786.38,902.09 786.38,927.34 791.38,932.34 809.38,932.34 813.88,936.84 813.88,955.34 818.88,960.34 840.57,960.34 844.38,964.15 844.38,969.53 840.57,973.34 817.48,973.34 813.38,977.44 813.38,983.24 817.48,987.34 838.99,987.34 843.38,991.73 843.38,997.94 838.99,1002.34 811.07,1002.34 806.38,1007.02 806.38,1013.65 811.07,1018.34 818.38,1018.34 823.38,1023.34 823.38,1029.43 818.87,1033.94 818.87,1041.46 809.94,1050.39 808.62,1050.39 803.62,1055.39 v1(803.62,1066.63)
  Signal Layer 2 w4.5: v1(431.45,509.94) 491.53,509.94 499.83,501.64 573.1,501.64 586.8,515.34 624.38,515.34 634.38,525.34 699.48,525.34 v1(714.88,509.94) 734.38,509.94 739.78,515.34 822.58,515.34 834.04,503.89 847.83,503.89 854.79,510.84 895.48,510.84 901.98,504.34 913.78,504.34 919.38,509.94 929.38,509.94 936.23,503.09 947.53,503.09 954.38,509.94 v1(998.38,509.94)
  Bottom Layer w4.7: v1(431.45,509.94) 457.98,509.94 466.38,518.34 482.09,518.34 492.79,507.64 494.94,505.48 494.94,495.9 505.44,485.4 569.65,485.4 574.38,490.12 574.38,496.81 569.09,502.1 U7.K1@542.43,502.11 ; v1(998.38,509.94) 1025.33,509.94 1032.73,517.34 1057.38,517.34 1062.38,512.34 1062.38,495.34 1071.38,486.34 1138.38,486.34 1143.38,491.34 1143.38,497.1 1138.38,502.1 U9.K1@1109.36,502.11
DRAM_SDQS0: U3.AE3 U8.F3 | length 1026.4
  Top Layer w3.7: U8.F3@353.45,628.09 352.48,627.1 352.48,612.34 355.39,609.43 359.73,609.43 364.63,614.34 370.38,614.34 374.38,610.34 374.38,609.58 378.38,605.58 386.9,605.58 404.37,623.06 404.37,851.35 398.38,857.34 253.08,857.34 244.63,848.89 195.1,848.89 183.83,860.16 183.83,936.07 194.1,946.34 211.56,946.34 221.83,936.07 221.83,898.89 226.83,893.89 261.33,893.89 266.33,898.89 266.33,946.95 275.72,956.34 288.99,956.34 298.38,946.95 298.38,932.34 304.24,926.48 322.52,926.48 378.42,982.38 378.42,995.34 375.42,998.34 370.38,998.34 369.66,997.62 364.1,997.62 360.16,1001.56 360.16,1007.12 362.91,1009.87 362.91,1017.81 364.49,1019.39 U3.AE3@378.42,1019.39
DRAM_SDQS0_B: U3.AD3 U8.G3 | length 1026.7
  Top Layer w3.7: U8.G3@353.45,596.59 390.63,596.58 413.37,619.33 413.37,855.08 402.11,866.34 249.35,866.34 240.9,857.89 198.83,857.89 192.83,863.89 192.83,932.34 197.83,937.34 207.83,937.34 212.83,932.34 212.83,895.16 223.1,884.89 265.06,884.89 275.33,895.16 275.33,943.22 279.45,947.34 285.26,947.34 289.38,943.22 289.38,928.61 300.51,917.48 326.99,917.48 387.42,977.91 387.42,1002.38 393.67,1008.63 393.67,1026.05 378.42,1041.3 U3.AD3@378.42,1050.88
DRAM_SDQS1: U3.AD6 U8.C7 | length 657.2
  Top Layer w3.7: U3.AD6@472.91,1050.88 456.66,1034.63 456.66,1015.87 456.53,1015.74 456.53,956.87 448.25,948.59 415.06,948.59 406.09,939.62 406.09,911.67 401.76,907.34 395.62,907.34 391.29,911.67 391.29,937.59 381.88,947 369.23,947 330.38,908.14 330.38,889.11 340.65,878.84 423.47,878.84 429.97,872.34 439.93,872.34 444,868.27 444,850.08 429.38,835.45 429.38,781.08 423.33,775.03 423.33,732.85 433.6,722.58 U8.C7@479.43,722.58
DRAM_SDQS1_B: U3.AE6 U8.B7 | length 657.7
  Top Layer w3.7: 445.87,839.21 453,846.35 453,872 443.66,881.34 433.7,881.34 427.2,887.84 344.38,887.84 339.38,892.84 339.38,904.41 372.96,938 378.15,938 382.29,933.87 382.29,907.94 391.89,898.34 405.49,898.34 415.09,907.94 415.09,935.89 418.79,939.59 451.98,939.59 465.53,953.14 465.53,956.03 469.23,959.73 475.03,959.73 478.73,963.43 478.73,970.83 475.03,974.53 469.23,974.53 465.53,978.23 465.53,985.63 469.23,989.33 475.03,989.33 478.73,993.03 478.73,1000.43 475.03,1004.13 469.23,1004.13 465.53,1007.83 465.53,1012.01 U3.AE6@472.91,1019.39 ; 445.88,839.21 438.38,831.71 438.38,777.34 432.33,771.29 432.33,736.58 437.33,731.58 466.96,731.58 479.38,744 479.38,754 U8.B7@479.43,754.07
DRAM_SDQS2: U3.AD8 U7.C7 | length 609
  Top Layer w3.7: v1(520.15,1035.14) U3.AD8@535.9,1050.88
  Bottom Layer w3.7: U7.C7@353.46,722.58 399.08,722.57 402.1,722.59 412.37,732.86 412.37,855.32 404.1,863.59 389.37,863.59 377.6,875.36 377.6,967.03 388.91,978.34 500.65,978.34 503.38,975.61 503.38,969.34 513.38,959.34 534.06,959.34 544.33,969.61 544.33,1017.07 533.06,1028.34 526.95,1028.34 v1(520.15,1035.14)
DRAM_SDQS2_B: U3.AE8 U7.B7 | length 608
  Top Layer w3.7: v1(520.15,1003.64) U3.AE8@535.9,1019.39
  Bottom Layer w3.7: U7.B7@353.46,754.07 358.13,754.06 358.38,754.32 382.37,754.32 385.37,751.32 385.37,736.59 390.37,731.59 398.37,731.59 403.37,736.59 403.37,851.59 400.37,854.59 385.64,854.59 368.6,871.63 368.6,970.76 385.18,987.34 504.38,987.34 512.38,979.34 512.38,973.07 517.11,968.34 530.33,968.34 535.33,973.34 535.33,1013.34 529.33,1019.34 523.83,1019.34 520.15,1015.66 v1(520.15,1003.64)
DRAM_SDQS3: U3.AC10 U7.F3 | length 852.5
  Top Layer w3.7: v1(583.14,1066.63) U3.AC10@598.89,1082.38
  Bottom Layer w3.7: U7.F3@479.44,628.09 479.44,613.4 474.66,608.62 400.1,608.62 396.39,612.33 396.39,647.62 399.1,650.34 411.64,650.34 421.38,660.08 421.38,673.86 411.64,683.6 398.12,683.6 395.39,686.34 395.39,693.35 398.38,696.34 436.63,696.34 445.38,705.09 445.38,875.34 457.38,887.34 457.38,928.65 469.57,940.84 490.88,940.84 522.38,909.34 525.65,909.34 530.65,904.34 558.11,904.34 567.38,913.61 567.38,965.61 571.08,969.31 576.68,969.31 580.38,973.01 580.38,979.31 576.68,983.01 571.08,983.01 567.38,986.71 567.38,993.01 571.08,996.71 576.68,996.71 580.38,1000.41 580.38,1006.71 576.68,1010.41 571.08,1010.41 567.38,1014.11 567.38,1043.14 575.5,1051.26 575.5,1058.98 579.16,1062.64 v1(583.14,1066.63)
DRAM_SDQS3_B: U3.AB10 U7.G3 | length 852.6
  Top Layer w3.7: v1(583.14,1098.13) U3.AB10@598.89,1113.88
  Bottom Layer w3.7: U7.G3@479.44,596.59 465.58,596.58 462.54,599.62 396.37,599.62 387.39,608.6 387.39,651.34 395.36,659.34 407.91,659.34 412.38,663.81 412.38,670.13 407.91,674.6 394.38,674.6 386.39,682.62 386.39,697.08 394.65,705.34 432.9,705.34 436.38,708.82 436.38,881.06 448.38,893.07 448.38,932.38 465.84,949.84 494.61,949.84 526.11,918.34 529.38,918.34 534.38,913.34 554.38,913.34 558.38,917.34 558.38,1046.87 566.5,1054.99 566.5,1081.48 v1(583.14,1098.13)
DRAM_SDQS4: U3.AD18 U10.F3 | length 924.3
  Top Layer w3.7: U3.AD18@850.86,1050.88 842.32,1042.34 842.32,1032.41 835.61,1025.7 835.61,1025.57 834.61,1024.57 834.61,984.11 848.38,970.34 848.38,915.61 858.65,905.34 866.38,905.34 871.38,900.34 871.38,889.34 866.38,884.34 789.65,884.34 779.38,874.07 779.38,834.61 790.65,823.34 829.38,823.34 838.38,832.34 838.38,844.61 844,850.23 858.76,850.23 861.38,847.61 861.38,828.61 871.65,818.34 899.11,818.34 909.38,828.61 909.38,850.34 914.38,855.34 950.38,855.34 955.38,850.34 955.38,688.34 965.22,678.5 996.49,678.5 999.38,675.61 999.38,639.38 971.34,611.34 955.11,611.34 942.07,624.38 924.09,624.38 U10.F3@920.38,628.09
DRAM_SDQS4_B: U3.AE18 U10.G3 | length 923.9
  Top Layer w3.7: U3.AE18@850.86,1019.39 850.43,1019.39 843.61,1012.57 843.61,1007.11 849.38,1001.34 849.38,998.11 843.61,992.34 843.61,987.84 857.38,974.07 857.38,919.34 862.38,914.34 870.11,914.34 880.38,904.07 880.38,885.61 870.11,875.34 793.38,875.34 788.38,870.34 788.38,838.34 794.38,832.34 825.65,832.34 829.38,836.07 829.38,848.34 840.27,859.23 862.49,859.23 870.38,851.34 870.38,832.34 875.38,827.34 895.38,827.34 900.38,832.34 900.38,854.07 910.65,864.34 954.11,864.34 964.38,854.07 964.38,692.07 968.95,687.5 1000.22,687.5 1008.38,679.34 1008.38,635.65 975.07,602.34 951.38,602.34 938.34,615.38 924.42,615.38 920.39,611.35 U10.G3@920.38,596.59
DRAM_SDQS5: U3.AD20 U10.C7 | length 558.3
  Top Layer w3.7: U3.AD20@913.85,1050.88 913.85,1040.81 907.68,1034.64 907.54,1034.64 898.6,1025.7 898.6,1004.29 895.96,1001.65 895.96,983.55 910.38,969.13 910.38,891.61 918.65,883.34 1001.11,883.34 1006.11,888.34 1023.38,888.34 1028.38,883.34 1028.38,868.34 1023.38,863.34 995.65,863.34 987.38,855.07 987.38,723.61 997.65,713.34 1013.11,713.34 1022.34,722.57 U10.C7@1046.36,722.58
DRAM_SDQS5_B: U3.AE20 U10.B7 | length 559.1
  Top Layer w3.7: U3.AE20@913.85,1019.39 913.85,1006.81 904.96,997.92 904.96,987.28 919.38,972.86 919.38,963.34 923.38,959.34 928.69,959.34 933.38,954.65 933.38,948.03 928.69,943.34 923.38,943.34 919.38,939.34 919.38,933.34 923.38,929.34 927.38,929.34 931.38,925.34 931.38,913.34 927.38,909.34 923.38,909.34 919.38,905.34 919.38,895.34 922.38,892.34 997.38,892.34 1002.38,897.34 1027.11,897.34 1037.38,887.07 1037.38,864.61 1027.11,854.34 999.38,854.34 996.38,851.34 996.38,727.34 1001.38,722.34 1009.38,722.34 1014.38,727.34 1014.38,743.08 1025.36,754.06 U10.B7@1046.36,754.07
DRAM_SDQS6: U3.AD23 U9.C7 | length 517.4
  Top Layer w3.7: U3.AD23@1008.34,1050.88 1023.59,1035.64 1023.59,978.6 1016.33,971.35 1013.1,968.12 1013.1,960.5 v1(1024.32,949.28)
  Bottom Layer w3.7: U9.C7@920.39,722.58 920.61,722.57 926.38,728.34 959.11,728.34 968.38,737.61 968.38,851.34 954.38,865.34 921.88,865.34 917.38,869.84 917.38,880.84 921.88,885.34 1007.11,885.34 1016.38,894.61 1016.38,941.47 1024.25,949.34 1024.25,949.28 v1(1024.32,949.28)
DRAM_SDQS6_B: U3.AE23 U9.B7 | length 517.9
  Top Layer w3.7: v1(997.51,949.34) 997.51,965.27 1007.33,975.09 1014.59,982.34 1014.59,995.88 1010.33,1000.14 995.38,1000.14 990.38,1005.14 990.38,1011.37 992.08,1013.07 992.08,1016.09 995.38,1019.39 U3.AE23@1008.34,1019.39
  Bottom Layer w3.7: U9.B7@920.39,754.07 920.39,740.34 923.39,737.34 927.38,737.34 932.38,742.34 941.38,742.34 946.38,737.34 955.38,737.34 959.38,741.34 959.38,847.61 950.65,856.34 918.15,856.34 908.38,866.11 908.38,884.57 918.15,894.34 1003.38,894.34 1007.38,898.34 1007.38,946.39 1004.43,949.34 v1(997.51,949.34)
DRAM_SDQS7: U3.AA25 U9.F3 | length 1017.7
  Top Layer w3.7: U3.AA25@1071.33,1145.37 1077.65,1139.05 1087.83,1139.05 1095.31,1131.58 1110.84,1131.58 1119.65,1140.39 1142.24,1140.39 1153.37,1129.26 1155.19,1129.26 1159.03,1125.42 1159.03,1119.56 v1(1170.25,1108.34)
  Bottom Layer w3.7: U9.F3@1046.37,628.09 1046.37,615.02 1038.7,607.34 1028.38,607.34 995.38,640.34 995.38,653.34 1004.38,662.34 1004.38,686.34 995.38,695.34 995.38,853.34 1001.38,859.34 1061.29,859.34 1072.88,870.93 1072.88,932.34 1077.88,937.34 1109.33,937.34 1114.33,932.34 1114.33,891.39 1135.83,869.89 1169.56,869.89 1188.84,889.16 1188.84,918.61 1171.83,935.62 1171.83,971.62 1150.23,993.22 1150.23,993.64 1135.68,1008.19 1135.26,1008.19 1126.83,1016.62 1126.83,1058.06 1146.16,1077.39 1146.33,1077.39 1157.33,1088.39 1157.33,1102.34 1163.34,1108.34 v1(1170.25,1108.34)
DRAM_SDQS7_B: U3.AA24 U9.G3 | length 1017.5
  Top Layer w3.7: U3.AA24@1039.84,1145.37 1055.15,1130.05 1084.1,1130.05 1091.58,1122.58 1114.57,1122.58 1123.38,1131.39 1138.51,1131.39 1143.51,1126.39 v1(1143.51,1108.34)
  Bottom Layer w3.7: U9.G3@1046.37,596.59 1026.41,596.58 986.38,636.61 986.38,657.07 995.38,666.07 995.38,682.61 986.38,691.61 986.38,857.07 997.65,868.34 1057.56,868.34 1063.88,874.66 1063.88,936.07 1074.15,946.34 1113.06,946.34 1123.33,936.07 1123.33,895.12 1139.56,878.89 1165.83,878.89 1179.84,892.89 1179.84,914.88 1162.83,931.89 1162.83,967.89 1141.23,989.49 1141.23,989.91 1131.95,999.19 1131.53,999.19 1117.83,1012.89 1117.83,1061.79 1137.42,1081.38 1137.42,1086.39 1143.51,1092.48 v1(1143.51,1108.34)
DRAM_WE_B: U3.AB16 U7.L3 U8.L3 U9.L3 U10.L3 | length 2338.3
  Top Layer w4.7: U8.L3@353.45,470.61 356.19,470.6 384.45,442.34 384.45,422.84 389.45,417.84 v1(431.45,417.84) ; U3.AB16@787.87,1113.88 v1(803.62,1098.13) ; U10.L3@920.38,470.61 923.12,470.6 951.38,442.34 951.38,422.84 956.38,417.84 v1(998.38,417.84)
  Signal Layer 1 w4.5: v1(714.88,417.84) 727.88,417.84 733.05,412.67 733.05,402.55 794.88,340.73 794.88,268.84 818.38,245.34 881.38,245.34 898.38,262.34 898.38,501.34 826.13,573.59 826.13,592.27 805.57,612.83 803.83,612.83 793.87,622.79 793.87,810.31 862.39,878.83 ; v1(803.62,1098.13) 832.59,1098.13 850.38,1080.34 850.38,1027.34 865.38,1012.34 865.38,881.85 863.88,880.35 ; 862.39,878.85 863.88,880.34
  Signal Layer 2 w4.5: v1(431.45,417.84) 451.79,417.84 467.83,433.89 489.83,433.89 515.61,408.11 564.5,408.11 574.24,417.84 v1(714.88,417.84) 763.34,417.84 769.84,411.34 824.35,411.34 824.7,410.99 835.86,399.84 ; 835.88,399.84 836.38,399.34 883.29,399.34 905.33,421.39 918.83,421.39 926.88,413.34 939.38,413.34 943.88,417.84 v1(998.38,417.84)
  Bottom Layer w4.7: v1(431.45,417.84) 423.88,417.84 419.38,422.34 419.38,428.69 423.88,433.19 442.23,433.19 448.47,439.43 448.47,462.24 456.83,470.6 U7.L3@479.44,470.61 ; v1(998.38,417.84) 988.88,417.84 984.38,422.34 984.38,428.69 988.88,433.19 1004.74,433.19 1013.73,442.18 1013.73,456.39 1027.94,470.6 U9.L3@1046.37,470.61
EIM-A16: R102.1 U3.H25 | length 754.4
  Top Layer w4.7: U3.H25@1071.33,1554.82 1141.25,1554.82 v1(1157,1570.57)
  Signal Layer 1 w4.5: v1(1157,1570.57) 1276.2,1570.57 1380.96,1465.81 1681.77,1465.81 v2(1698,1482.05)
  Bottom Layer w10: v2@1698,1482.08 1716.97,1501.05 1735.87,1501.05 1751.11,1485.81 R102.1@1751.11,1482.05
EIM-A17: R103.1 U3.G24 | length 772.7
  Top Layer w4.7: U3.G24@1039.84,1586.32 1056.16,1570 1112.63,1570 v2(1121,1578.37)
  Top Layer w10: v2(1728,1525.35) R103.1@1751.11,1525.35
  Signal Layer 1 w4.5: v2(1121,1578.37) 1129.27,1586.64 1277.36,1586.64 1365.69,1498.31 1393.95,1498.31 1407.42,1498.33 ; 1407.44,1498.31 1470.13,1498.31 1483.61,1498.33 1700.96,1498.31 v2(1728,1525.35)
EIM-A18: R104.1 U3.J22 | length 868.3
  Top Layer w10: U3.J22@976.84,1523.32 v1(992.59,1539.07) ; v2(1728,1438.74) R104.1@1751.11,1438.74
  Signal Layer 1 w4.5: v1(992.59,1539.07) 1002.66,1529 1199.98,1529 1224.48,1504.5 1305.5,1504.5 1339.1,1470.9 1339.1,1429.9 1356.79,1412.21 1701.47,1412.21 v2(1728,1438.74)
EIM-A19: R105.1 U3.G25 | length 749.4
  Top Layer w4.7: U3.G25@1071.33,1586.32 1099.32,1586.32 1110,1597 1153,1597 v1(1158,1602)
  Signal Layer 1 w4.5: v1(1158,1602) 1161.05,1598.95 1283.05,1598.95 1372.86,1509.14 1508.77,1509.14 ; 1508.78,1509.12 1681.77,1509.12 v2(1698,1525.35)
  Bottom Layer w10: v2@1698,1525.39 1716.97,1544.35 1735.87,1544.35 1751.11,1529.11 R105.1@1751.11,1525.35
EIM-A20: R107.1 U3.H22 | length 888
  Top Layer w10: U3.H22@976.84,1554.82 v1(992.59,1570.57)
  Signal Layer 1 w4.5: v1(992.59,1570.57) 1019.16,1544 1197,1544 1228,1513 1309.73,1513 1348.1,1474.63 1348.1,1440.28 1367.17,1421.21 1680.47,1421.21 v2(1698,1438.74)
  Bottom Layer w10: v2(1698,1438.74) 1716.97,1457.74 1735.87,1457.74 1751.11,1442.5 R107.1@1751.11,1438.74
EIM-A21: R108.1 U3.H23 | length 807.9
  Top Layer w10: U3.H23@1008.34,1554.82 v1(1024.08,1570.57) ; v2(1728,1482.05) R108.1@1751.11,1482.05
  Signal Layer 1 w4.5: v1(1024.08,1570.57) 1039.33,1555.32 1204.18,1555.32 1238,1521.5 1313.25,1521.5 1379.23,1455.52 1701.47,1455.52 v2(1728,1482.05)
EIM-A22: R109.1 U3.F24 | length 767.2
  Top Layer w4.7: U3.F24@1039.84,1617.81 1056.65,1601 1099.38,1601 1113.38,1615 v2(1122,1615)
  Top Layer w10: v2(1728,1568.66) R109.1@1751.11,1568.66
  Signal Layer 1 w4.5: v2(1122,1615) 1125.31,1618.31 1165,1618.31 1173.31,1610 1291,1610 1358,1543 1702.34,1543 v2(1728,1568.66)
EIM-A23: R110.1 U3.J21 | length 1029.5
  Top Layer w10: U3.J21@945.35,1523.32 v1(961.09,1539.07)
  Signal Layer 1 w4.5: v1(961.09,1539.07) 976.34,1523.82 976.34,1470.76 986.27,1460.83 1032.52,1460.83 1068.68,1497 1195.92,1497 1214.82,1478.1 1284.9,1478.1 1312.1,1450.9 1312.1,1372 1349.5,1334.6 1680.47,1334.6 v2(1698,1352.13)
  Bottom Layer w10: v2(1698,1352.13) 1716.97,1371.13 1735.87,1371.13 1751.11,1355.89 R110.1@1751.11,1352.13
EIM-A24: R111.1 U3.F25 | length 745.2
  Top Layer w4.7: U3.F25@1071.33,1617.81 1101.69,1617.81 1115.23,1631.35 1145.05,1631.35 v2(1148,1634.3)
  Signal Layer 1 w4.5: v2(1148,1634.3) 1163.7,1634.3 1178,1620 1298,1620 1365.57,1552.43 1681.77,1552.43 v2(1698,1568.66)
  Bottom Layer w10: v2@1698,1568.69 1716.97,1587.66 1735.87,1587.66 1751.11,1572.42 R111.1@1751.11,1568.66
EIM-DA0: R69.1 U3.L20 | length 713.1
  Top Layer w10: U3.L20@913.85,1460.33 v1(929.6,1476.08) ; v2(1515.51,1482.06) R69.1@1538.86,1482.06
  Bottom Layer w4.7: v1(929.6,1476.08) 945.68,1460 1058,1460 1081.65,1483.65 1081.65,1483.77 1092.88,1495 1279,1495 1325.74,1541.74 1483.65,1541.74 1496,1529.38 1496,1501.58 v2(1515.51,1482.06)
EIM-DA1: R71.1 U3.J25 | length 303.9
  Top Layer w4.7: U3.J25@1071.33,1523.32 1140.68,1523.32 1151,1513 1292.17,1513 R71.1@1347.87,1568.69
EIM-DA2: R73.1 U3.L21 | length 706.3
  Top Layer w10: U3.L21@945.35,1460.33 v1(961.09,1476.08) ; v2(1515.52,1611.98) R73.1@1538.87,1611.98
  Bottom Layer w4.7: v1(961.09,1476.08) 977.24,1492.23 998.95,1492.23 1008.73,1502.01 1008.73,1513.94 1017.72,1522.93 1054.93,1522.93 1073,1541 1177.3,1541 1230.79,1594.49 1303.49,1594.49 1362.25,1653.25 1489.27,1653.25 1515.52,1627 v2(1515.52,1611.98)
EIM-DA3: R75.1 U3.K24 | length 396.2
  Top Layer w4.7: U3.K24@1039.84,1491.83 1039.84,1502.84 1055.59,1518.59 1055.59,1527.88 1067.71,1540 1146.37,1540 1163.37,1523 1280,1523 1317,1560 1317,1581.13 R75.1@1347.87,1612
EIM-DA4: R77.1 U3.L22 | length 682.6
  Top Layer w10: U3.L22@976.84,1460.33 v1(992.59,1476.08) ; v2(1515.51,1568.68) R77.1@1538.86,1568.68
  Bottom Layer w4.7: v1(992.59,1476.08) 1001.08,1476.08 1017.22,1492.22 1047.29,1492.22 1078,1522.93 1184.93,1522.93 1240.37,1578.37 1315.37,1578.37 1374.5,1637.5 1478.5,1637.5 1496,1620 1496,1588.19 v2(1515.51,1568.68)
EIM-DA5: R79.1 U3.L23 | length 579.5
  Top Layer w10: U3.L23@1008.34,1460.33 v1(1024.08,1476.08) ; v2(1515.51,1525.37) R79.1@1538.86,1525.37
  Bottom Layer w4.7: v1(1024.08,1476.08) 1053.34,1476.08 1087.26,1510 1272.65,1510 1314.65,1552 1488.88,1552 v2(1515.51,1525.37)
EIM-DA6: R81.1 U3.K25 | length 281.8
  Top Layer w4.7: U3.K25@1071.33,1491.83 1072.85,1493.35 1136.79,1493.35 1139.36,1490.78 1339.17,1490.78 R81.1@1347.87,1482.08
EIM-DA7: R84.1 U3.L25 | length 324.6
  Top Layer w4.7: U3.L25@1071.33,1460.33 1159.38,1460.33 1171.04,1472 1291,1472 1327,1436 1327,1416.33 R84.1@1347.87,1395.46
EIM-DA8: R86.1 U3.L24 | length 351.8
  Top Layer w4.7: U3.L24@1039.84,1460.33 1039.84,1469.84 1056.51,1486.51 1056.51,1499.85 1062.84,1506.18 1138.82,1506.18 1143,1502 1324.48,1502 R86.1@1347.87,1525.39
EIM-DA9: R88.1 U3.M21 | length 689.3
  Top Layer w10: U3.M21@945.35,1428.84 v1(961.09,1444.59) ; v2(1515.51,1352.14) R88.1@1538.86,1352.14
  Bottom Layer w4.7: v1(961.09,1444.59) 1016.68,1389 1193,1389 1254,1450 ; 1254,1451 1287,1451 1358.89,1379.11 1488.54,1379.11 v2(1515.51,1352.14)
EIM-DA10: R90.1 U3.M22 | length 656.7
  Top Layer w10: U3.M22@976.84,1428.84 v1(992.59,1444.59) ; v2(1515.51,1395.45) R90.1@1538.86,1395.45
  Bottom Layer w4.7: v1(992.59,1444.59) 1034.41,1402.78 1176.78,1402.78 1239,1465 1326.17,1465 1336.05,1455.12 1483.65,1455.12 1493.22,1445.54 1493.22,1417.74 v2(1515.51,1395.45)
EIM-DA11: R92.1 U3.M20 | length 714
  Top Layer w10: U3.M20@913.85,1428.84 v1(929.6,1444.59) ; v2(1515.51,1308.83) R92.1@1538.86,1308.83
  Bottom Layer w4.7: v1(929.6,1444.59) 998.19,1376 1232,1376 1244,1388 1282,1388 1301.49,1368.51 1458,1368.51 1483.64,1368.51 1493.22,1358.93 1493.22,1331.13 v2(1515.51,1308.83)
EIM-DA12: R94.1 U3.M24 | length 360.4
  Top Layer w4.7: U3.M24@1039.84,1428.84 1039.84,1438.84 1055.59,1454.59 1055.59,1465.78 1066.81,1477 1098,1477 1149,1477 1154.08,1482.08 1304.56,1482.08 R94.1@1347.87,1438.77